# EAGLE board teensy36-ubuntu-breakout (EAGLE 8.7.1)
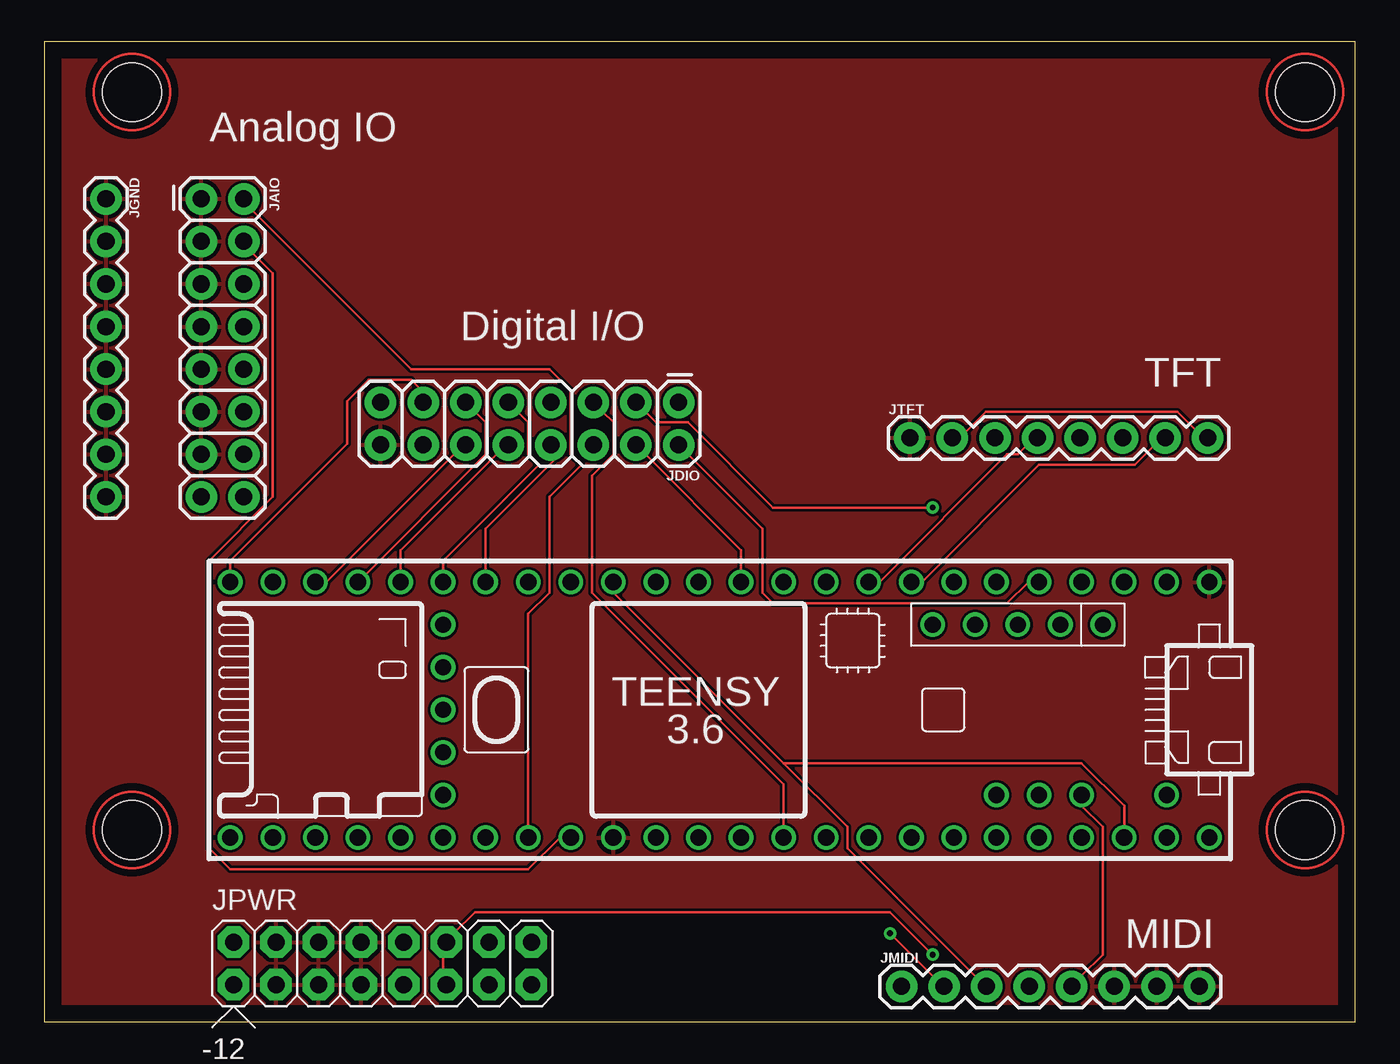
[diagram p0: board, top side]
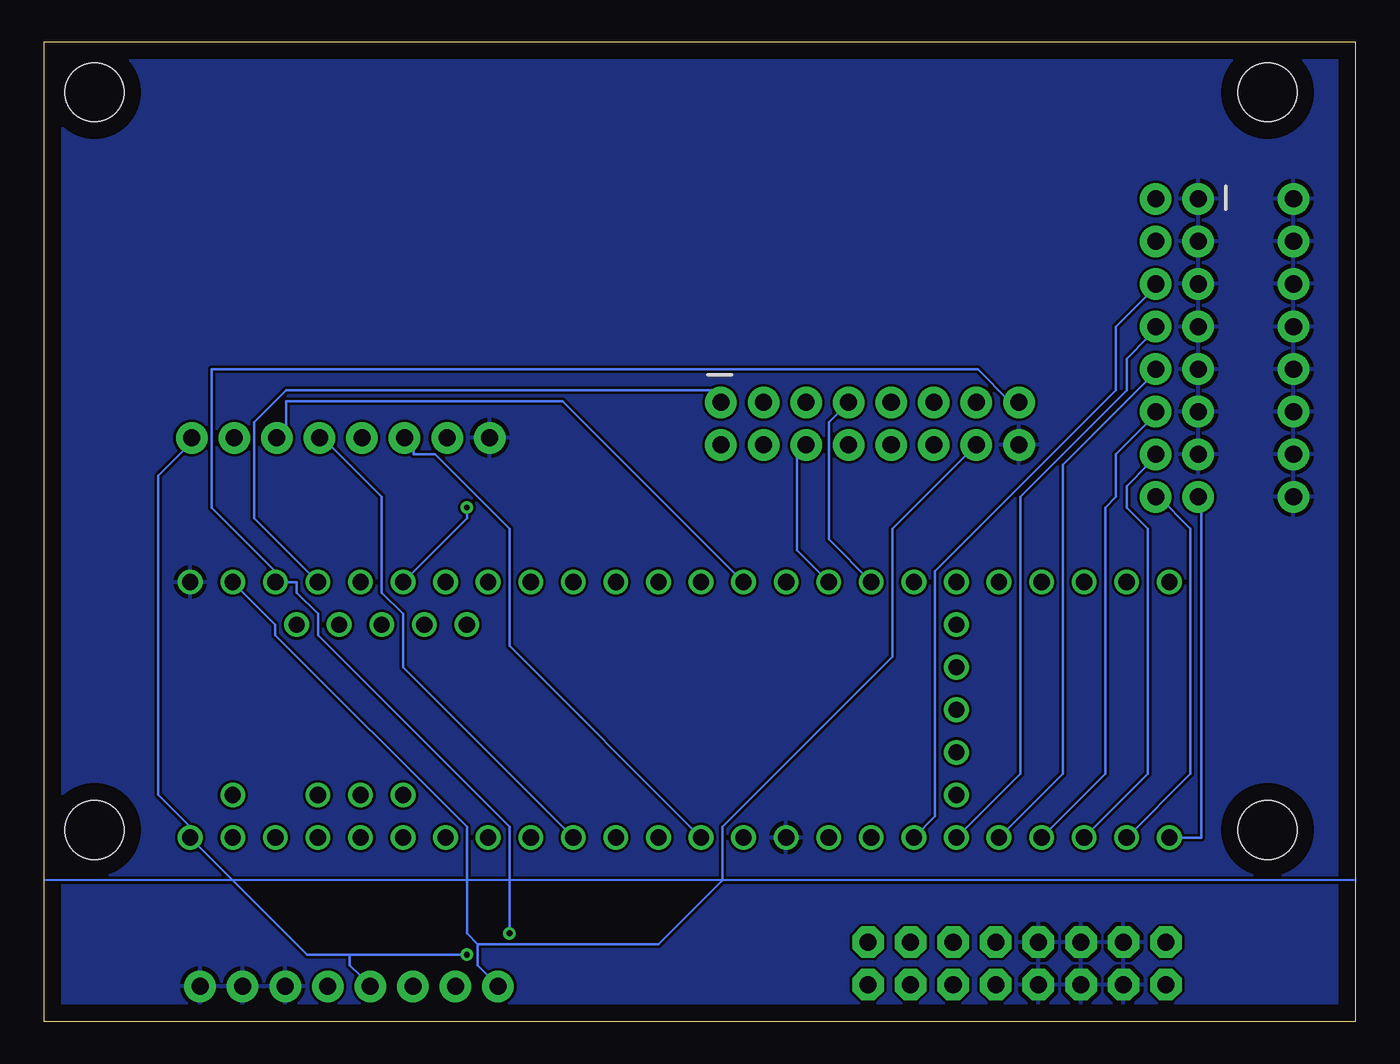
[diagram p1: board, bottom side, seen from below]

Size 78.25 x 58.45 mm. Coordinates in mm from the lower left corner, seen from the top.
Outline: 0,0 78.25,0 78.25,58.45 0,58.45 0,0
Copper layers (1*16): Top 0.035mm / dielectric 1.5mm / Bottom 0.035mm
Design rules "default": minimum track width 6mil, minimum drill 0.35mm, track to track 6mil, track to pad 6mil, pad to pad 6mil, via to via 6mil, smd to smd 6mil, copper to edge 40mil, drill to drill 6mil, minimum pad ring 10mil, minimum via ring 8mil, stop-mask expansion 4mil, vias tented up to drill 0mil, thermal gap 10mil
Holes 3.5 mm at 5.25,11.45 75.25,11.45 75.25,55.45 5.25,55.45

## Footprints (pad centres in the part's own frame; a part is rotated, then mirrored left to right if it is on the bottom)
2X8 = drill 1.016 pad 1.88: 1 0,0; 2 0,2.54; 3 2.54,0; 4 2.54,2.54; 5 5.08,0; 6 5.08,2.54; 7 7.62,0; 8 7.62,2.54; 9 10.16,0; 10 10.16,2.54; 11 12.7,0; 12 12.7,2.54; 13 15.24,0; 14 15.24,2.54; 15 17.78,0; 16 17.78,2.54
1X08 = drill 1.016 pad 1.88: 1 0,0; 2 2.54,0; 3 5.08,0; 4 7.62,0; 5 10.16,0; 6 12.7,0; 7 15.24,0; 8 17.78,0
POWER_16 = drill 1.016 pad 1.88 octagon: 1 -6.35,-1.27; 2 -6.35,1.27; 3 -3.81,-1.27; 4 -3.81,1.27; 5 -1.27,-1.27; 6 -1.27,1.27; 7 1.27,-1.27; 8 1.27,1.27; 9 3.81,-1.27; 10 3.81,1.27; 11 6.35,-1.27; 12 6.35,1.27; 13 8.89,-1.27; 14 8.89,1.27; 15 11.43,-1.27; 16 11.43,1.27
TEENSY_3.5/3.6 = drill 0.965: 0/RX -25.4,-7.62; 1/TX -22.86,-7.62; 2 -20.32,-7.62; 3/CANTX -17.78,-7.62; 3V3 7.62,-7.62; 3V3_2 17.78,-2.54; 3V3_LO -22.86,7.62; 4/CANRX -15.24,-7.62; 5 -12.7,-7.62; 6 -10.16,-7.62; 7 -7.62,-7.62; 8 -5.08,-7.62; 9/CS -2.54,-7.62; 10/CS 0,-7.62; 11/MOSI 2.54,-7.62; 12/MISO 5.08,-7.62; 13/SCK 5.08,7.62; 14/A0 2.54,7.62; 15/A1 0,7.62; 16/A2 -2.54,7.62; 17/A3 -5.08,7.62; 18/A4/SDA -7.62,7.62; 19/A5/SCL -10.16,7.62; 20/A6 -12.7,7.62; 21/A7 -15.24,7.62; 21/DAC0 12.7,7.62; 22/A8 -17.78,7.62; 23/A9 -20.32,7.62; 24 10.16,-7.62; 25 12.7,-7.62; 26 15.24,-7.62; 27 17.78,-7.62; 28 20.32,-7.62; 29 22.86,-7.62; 30 25.4,-7.62; 31/A12 27.94,-7.62; 32/A13 30.48,-7.62; 33/A14 30.48,7.62; 34/A15 27.94,7.62; 35/A16 25.4,7.62; 36/A17 22.86,7.62; 37/A18 20.32,7.62; 38/A19 17.78,7.62; 39/A20 15.24,7.62; A10 -17.78,5.08; A11 -15.24,5.08; A22/DAC1 10.16,7.62; AGND -25.4,7.62; AREF -20.32,5.08; GND -27.94,-7.62; GND2 7.62,7.62; GND3 17.78,0; PROG 17.78,2.54; RESET 17.78,5.08; U5V -21.59,-5.08; UD+ -16.51,-5.08; UD- -19.05,-5.08; UGND1 -13.97,-5.08; UGND2 -11.43,-5.08; VBAT 17.78,-5.08; VIN -27.94,7.62; VUSB -25.4,5.08

## Placement (x,y rotation side)
JAIO  [2X8]  9.38,49.09 270 top
JDIO  [2X8]  37.86,36.95 180 top
JGND  [1X08]  3.69,49.09 270 top
JMIDI  [1X08]  51.16,2.11 0 top
JPWR  POWER  [POWER_16]  17.65,3.48 0 top
JTFT  [1X08]  51.66,34.83 0 top
U$3  TEENSY_3.5/3.6  [TEENSY_3.5/3.6]  41.59,18.61 180 top

## Library data of the parts
JAIO JDIO = SparkFun-Connectors
JGND JMIDI JTFT = SparkFun-Connectors; PROD_ID: CONN-08438
JPWR = eurorack
U$3 = JC_Teensy356

## Nets
3V3: JMIDI.3 U$3.3V3 U$3.3V3_LO
AGND: U$3.AGND
AREF: JMIDI.5 U$3.AREF
GND: JAIO.1 JAIO.3 JAIO.5 JAIO.7 JAIO.9 JAIO.11 JAIO.13 JDIO.16 JGND.1 JGND.2 JGND.3 JGND.4 JGND.5 JGND.6 JGND.7 JGND.8 JMIDI.6 JMIDI.7 JMIDI.8 JPWR.3 JPWR.4 JPWR.5 JPWR.6 JPWR.7 JPWR.8 JTFT.1 U$3.GND U$3.GND2
MIDI_RX: JDIO.14 JMIDI.1 U$3.0/RX
MIDI_TX: JDIO.15 JMIDI.2 U$3.1/TX
SPI0_MOSI: JTFT.4 U$3.7
SPI0_SCLK: JTFT.3 U$3.14/A0
T2: JDIO.1 U$3.2
T3: JDIO.2 U$3.3/CANTX
T4: JDIO.3 U$3.4/CANRX
T10: JDIO.4 U$3.10/CS
T16: JDIO.5 U$3.16/A2
T24: JDIO.6 U$3.24
T25: JDIO.7 U$3.25
T26: JDIO.8 U$3.26
T27: JDIO.9 U$3.27
T28: JDIO.10 U$3.28
T29: JDIO.11 U$3.29
T30: JDIO.12 U$3.30
T32: JDIO.13 U$3.32/A13
TA14: JAIO.15 U$3.33/A14
TA15: JAIO.16 U$3.34/A15
TA16: JAIO.14 U$3.35/A16
TA17: JAIO.12 U$3.36/A17
TA18: JAIO.10 U$3.37/A18
TA19: JAIO.8 U$3.38/A19
TA20: JAIO.6 U$3.39/A20
TDAC0: JAIO.2 U$3.21/DAC0
TDAC1: JAIO.4 U$3.A22/DAC1
TFT_CS: JTFT.7 U$3.6
TFT_DC: JTFT.6 U$3.12/MISO
TFT_RST: JTFT.5 U$3.17/A3
VIN: JMIDI.4 JPWR.11 JPWR.12 JTFT.2 JTFT.8 U$3.VIN

## Tracks (layer width: path | path; a pad name or v marks a point on that pad's centre or on a via)
3V3
  Top 0.152: U$3.3V3 33.97,25.6 44.13,15.44 | 44.13,15.44 47.94,11.63 47.94,10.36 56.19,2.1 JMIDI.3 | U$3.3V3_LO 64.45,12.9 61.91,15.44 44.13,15.44
AREF
  Top 0.152: U$3.AREF 61.91,12.9 63.18,11.63 63.18,4.01 61.91,2.74 JMIDI.5
GND
  pour Top: -0.32,57.98 -0.32,10.99 -0.25,-6.15 84.84,-6.15 89.85,8.45 89.85,57.98 84.77,63.06 4.76,63.06
  pour Bottom: -4.13,59.25 0.95,64.33 84.77,64.33 91.12,57.98 91.12,7.18 86.95,-5.92 -0.68,-5.92 -4.13,9.72
MIDI_RX
  Bottom 0.152: U$3.0/RX 64.45,23.69 64.45,23.06 53.02,11.63 53.02,5.28 52.39,4.64 | 52.39,4.64 52.39,3.37 51.75,2.74 JMIDI.1 | 52.39,4.64 41.59,4.64 37.78,8.45 37.78,11.63 27.62,21.79 27.62,29.41 23.17,33.85 JDIO.14
MIDI_TX  (via drill 0.35)
  Top 0.152: v50.48,5.28 53.66,2.1 JMIDI.2
  Bottom 0.152: v50.48,5.28 50.48,11.63 61.91,23.06 61.91,24.33 63.18,25.6 63.18,26.23 U$3.1/TX 64.45,26.87 68.26,30.68 68.26,38.93 22.54,38.93 20.63,37.03 JDIO.15
SPI0_MOSI
  Top 0.152: U$3.7 49.84,26.23 57.47,33.85 58.1,33.85 58.73,34.49 JTFT.4
SPI0_SCLK
  Bottom 0.152: U$3.14/A0 50.48,22.42 50.48,29.41 54.92,33.85 56.19,33.85 56.19,34.49 JTFT.3
T2
  Bottom 0.152: U$3.2 65.72,30.04 65.72,35.76 63.81,37.66 37.78,37.66 37.78,37.03 JDIO.1
T3
  Top 0.152: U$3.3/CANTX 58.73,26.23 57.47,24.96 43.49,24.96 42.86,25.6 42.86,29.41 38.41,33.85 JDIO.2
T4  (via drill 0.35)
  Top 0.152: v53.02,30.68 43.49,30.68 38.41,35.76 36.51,35.76 35.88,36.39 JDIO.3
  Bottom 0.152: U$3.4/CANRX 53.02,30.04 v53.02,30.68
T10
  Top 0.152: U$3.10/CS 41.59,28.14 35.88,33.85 JDIO.4
T16
  Top 0.152: U$3.16/A2 44.13,14.17 32.7,25.6 32.7,32.58 33.97,33.85 33.97,35.76 33.34,36.39 JDIO.5
T24
  Bottom 0.152: U$3.24 33.34,28.14 33.34,33.85 JDIO.6
T25
  Bottom 0.152: U$3.25 31.43,28.77 31.43,35.76 30.8,36.39 JDIO.7
T26
  Top 0.152: U$3.26 26.35,29.41 30.8,33.85 JDIO.8
T27
  Top 0.152: U$3.27 23.81,27.5 29.52,33.22 28.89,33.85 28.89,35.76 28.26,36.39 JDIO.9
T28
  Top 0.152: U$3.28 21.27,28.14 27.62,34.49 JDIO.10
T29
  Top 0.152: U$3.29 26.35,33.85 26.35,35.76 25.72,36.39 JDIO.11
T30
  Top 0.152: U$3.30 16.82,26.23 25.08,34.49 JDIO.12
T32
  Top 0.152: U$3.32/A13 11.11,27.5 18.09,34.49 18.09,37.03 19.36,38.3 21.91,38.3 23.17,37.03 JDIO.13
TA14
  Bottom 0.152: U$3.33/A14 9.2,10.99 9.2,31.31 JAIO.15
TA15
  Bottom 0.152: U$3.34/A15 9.84,14.8 9.84,29.41 11.75,31.31 JAIO.16
TA16
  Bottom 0.152: U$3.35/A16 12.38,14.8 12.38,29.41 13.65,30.68 13.65,31.95 12.38,33.22 12.38,33.85 JAIO.14
TA17
  Bottom 0.152: U$3.36/A17 14.92,14.8 14.92,30.68 14.29,31.31 14.29,33.85 12.38,35.76 12.38,36.39 JAIO.12
TA18
  Bottom 0.152: U$3.37/A18 17.46,14.8 17.46,33.22 12.38,38.3 12.38,38.93 JAIO.10
TA19
  Bottom 0.152: U$3.38/A19 20,14.8 20,31.31 13.65,37.66 13.65,39.57 12.38,40.84 12.38,41.47 JAIO.8
TA20
  Bottom 0.152: U$3.39/A20 25.08,12.26 25.08,26.87 14.29,37.66 14.29,41.47 12.38,43.38 12.38,44.01 JAIO.6
TDAC0
  Top 0.152: U$3.21/DAC0 28.89,24.33 30.16,25.6 30.16,31.31 32.06,33.22 31.43,33.85 31.43,37.66 30.16,38.93 21.91,38.93 11.75,49.09 JAIO.2
TDAC1
  Top 0.152: U$3.A22/DAC1 30.8,10.99 28.89,9.09 11.11,9.09 9.84,10.36 9.84,27.5 13.65,31.31 13.65,44.65 11.75,46.55 JAIO.4
TFT_CS
  Top 0.152: U$3.6 52.39,26.23 59.37,33.22 65.08,33.22 66.36,34.49 JTFT.7
TFT_DC
  Bottom 0.152: U$3.12/MISO 47.3,37.03 63.81,37.03 63.81,35.12 JTFT.6
TFT_RST
  Bottom 0.152: U$3.17/A3 56.83,21.15 56.83,24.33 58.1,25.6 58.1,31.31 61.28,34.49 JTFT.5
VIN  (via drill 0.35)
  Top 0.152: JTFT.2 54.29,35.12 54.92,35.12 56.19,36.39 67.62,36.39 68.89,35.12 JTFT.8 | JPWR.11 23.81,2.74 23.81,4.64 JPWR.12 24.45,5.28 25.72,6.55 50.48,6.55 v53.02,4.01
  Bottom 0.152: 60,4.01 62.55,4.01 U$3.VIN 69.53,11.63 71.44,13.53 71.44,32.58 69.53,34.49 JTFT.8 | 60,4.01 60,3.37 59.37,2.74 JMIDI.4 | 60,4.01 v53.02,4.01
(copper drawn outside any net)
  shapes: Bottom area x1, Top circle x4

## Text on the board
tPlace: Analog IO | Digital I/O | TFT | MIDI